# EAGLE board CT_schematic (EAGLE 7.6.0)

Size 100 x 80 mm. Coordinates in mm from the lower left corner, seen from the top.
Outline: 0,0 100,0 100,80 0,80 0,0
Copper layers (1*16): Top 0.035mm / dielectric 1.5mm / Bottom 0.035mm
Design rules "default": minimum track width 10mil, minimum drill 24mil, track to track 8mil, track to pad 8mil, pad to pad 8mil, via to via 8mil, smd to smd 8mil, copper to edge 40mil, drill to drill 8mil, minimum pad ring 10mil, minimum via ring 8mil, stop-mask expansion 4mil, vias tented up to drill 0mil, thermal gap 10mil

## Footprints (pad centres in the part's own frame; a part is rotated, then mirrored left to right if it is on the bottom)
C0603 = smd 0.8 x 0.8: 1 -0.762,0; 2 0.762,0
C0402 = smd 0.5 x 0.5: 1 -0.508,0; 2 0.508,0
C0805 = smd 1.2 x 1.3: 1 -1.016,0; 2 1.016,0
EXV-9B = smd 2.718 x 1.778: 1 -2.108,0; 2 2.108,0
EXV-9H = smd 3.505 x 1.676: 1 -2.857,0; 2 2.857,0
PJ-037B_PACKAGE = drill 3.7 square: 1 12,0 | drill 3.2 square: 2 6,0
R0603 = smd 0.8 x 0.8: 1 -0.762,0; 2 0.762,0
LQFP100 = smd 0.3 x 1.2: 1 -6,-7.75; 2 -5.5,-7.75; 3 -5,-7.75; 4 -4.5,-7.75; 5 -4,-7.75; 6 -3.5,-7.75; 7 -3,-7.75; 8 -2.5,-7.75; 9 -2,-7.75; 10 -1.5,-7.75; 11 -1,-7.75; 12 -0.5,-7.75; 13 0,-7.75; 14 0.5,-7.75; 15 1,-7.75; 16 1.5,-7.75; 17 2,-7.75; 18 2.5,-7.75; 19 3,-7.75; 20 3.5,-7.75; 21 4,-7.75; 22 4.5,-7.75; 23 5,-7.75; 24 5.5,-7.75; 25 6,-7.75; 51 6,7.75; 52 5.5,7.75; 53 5,7.75; 54 4.5,7.75; 55 4,7.75; 56 3.5,7.75; 57 3,7.75; 58 2.5,7.75; 59 2,7.75; 60 1.5,7.75; 61 1,7.75; 62 0.5,7.75; 63 0,7.75; 64 -0.5,7.75; 65 -1,7.75; 66 -1.5,7.75; 67 -2,7.75; 68 -2.5,7.75; 69 -3,7.75; 70 -3.5,7.75; 71 -4,7.75; 72 -4.5,7.75; 73 -5,7.75; 74 -5.5,7.75; 75 -6,7.75 | smd 1.2 x 0.3: 26 7.75,-6; 27 7.75,-5.5; 28 7.75,-5; 29 7.75,-4.5; 30 7.75,-4; 31 7.75,-3.5; 32 7.75,-3; 33 7.75,-2.5; 34 7.75,-2; 35 7.75,-1.5; 36 7.75,-1; 37 7.75,-0.5; 38 7.75,0; 39 7.75,0.5; 40 7.75,1; 41 7.75,1.5; 42 7.75,2; 43 7.75,2.5; 44 7.75,3; 45 7.75,3.5; 46 7.75,4; 47 7.75,4.5; 48 7.75,5; 49 7.75,5.5; 50 7.75,6; 76 -7.75,6; 77 -7.75,5.5; 78 -7.75,5; 79 -7.75,4.5; 80 -7.75,4; 81 -7.75,3.5; 82 -7.75,3; 83 -7.75,2.5; 84 -7.75,2; 85 -7.75,1.5; 86 -7.75,1; 87 -7.75,0.5; 88 -7.75,0; 89 -7.75,-0.5; 90 -7.75,-1; 91 -7.75,-1.5; 92 -7.75,-2; 93 -7.75,-2.5; 94 -7.75,-3; 95 -7.75,-3.5; 96 -7.75,-4; 97 -7.75,-4.5; 98 -7.75,-5; 99 -7.75,-5.5; 100 -7.75,-6
SOIC-8 = smd 1.6 x 0.6: 1 -2.7,1.905 | smd 1.55 x 0.6: 2 -2.7,0.635; 3 -2.7,-0.635; 4 -2.7,-1.905; 5 2.7,-1.905; 6 2.7,-0.635; 7 2.7,0.635; 8 2.7,1.905
QFN-16 = smd 0.813 x 0.305: 1 -1.448,0.75; 2 -1.448,0.25; 3 -1.448,-0.25; 4 -1.448,-0.75; 9 1.448,-0.75; 10 1.448,-0.25; 11 1.448,0.25; 12 1.448,0.75 | smd 0.305 x 0.813: 5 -0.75,-1.448; 6 -0.25,-1.448; 7 0.25,-1.448; 8 0.75,-1.448; 13 0.75,1.448; 14 0.25,1.448; 15 -0.25,1.448; 16 -0.75,1.448 | smd 1.803 x 1.803: 17 0,0
FCI_10118193-0001LF = smd 0.4 x 1.35: 1 -1.3,2.675; 2 -0.65,2.675; 3 0,2.675; 4 0.65,2.675; 5 1.3,2.675 | smd 1.6 x 1.4: 6 -3.2,2.45; 7 3.2,2.45 | smd 1.9 x 1.9: 8 -1.2,0; 9 1.2,0 | hole 0.5: -3.3,0; 3.3,0
SOT143B = smd 1 x 0.7: 1 -0.75,-1 | smd 0.6 x 0.7: 2 0.95,-1; 3 0.95,1; 4 -0.95,1
ABS07-32.768KHZ-7-T = smd 1.1 x 2.4: 1 -2.5,0; 2 0,0
ASFL1 = smd 1.7 x 1.5: 1 -1.27,-1.1; 2 1.27,-1.1; 3 1.27,1.1; 4 -1.27,1.1
LP2954 = smd 1.6 x 0.6: 1 -2.475,1.905 | smd 1.55 x 0.6: 2 -2.475,0.635; 3 -2.475,-0.635; 4 -2.475,-1.905; 5 2.475,-1.905; 6 2.475,-0.635; 7 2.475,0.635; 8 2.475,1.905
SON-6 = smd 0.55 x 0.3: 1 -0.355,0.5 | smd 0.52 x 0.3: 2 -0.37,0; 3 -0.37,-0.5; 4 0.37,-0.5; 5 0.37,0; 6 0.37,0.5
SW_4-1437565-2 = smd 1.4 x 2.1: 1 -2.23,4.55; 2 -2.23,-4.55; 3 2.23,4.55; 4 2.23,-4.55
LGM67K-G1J2-24-Z = smd 0.8 x 1.4: A -2,0; C 0,0
NC7SZ125M5X = smd 1.3 x 0.7: 1 -1.3,0.95; 2 -1.3,0; 3 -1.3,-0.95; 4 1.3,-0.95; 5 1.3,0.95

## Placement (x,y rotation side)
C1  1e-06  [C0603]  -15.24,62.23 0 top  (outside the outline)
C2  1e-07  [C0603]  -19.05,62.23 0 top  (outside the outline)
C3  1e-07  [C0603]  -22.86,62.23 0 top  (outside the outline)
C4  1e-07  [C0603]  -26.67,62.23 0 top  (outside the outline)
C5  1e-07  [C0603]  -30.48,62.23 0 top  (outside the outline)
C6  1e-07  [C0603]  -34.29,62.23 0 top  (outside the outline)
C7  1e-07  [C0603]  -38.1,62.23 0 top  (outside the outline)
C8  4.7e-06  [C0603]  -64.77,57.15 0 top  (outside the outline)
C9  1e-07  [C0603]  -41.91,62.23 0 top  (outside the outline)
C10  1e-08  [C0603]  -45.72,62.23 0 top  (outside the outline)
C11  1e-06  [C0603]  -49.53,62.23 0 top  (outside the outline)
C12  1e-11  [C0402]  -26.67,67.31 0 top  (outside the outline)
C13  1e-11  [C0402]  -30.48,67.31 0 top  (outside the outline)
C14  1e-08  [C0402]  -34.29,67.31 0 top  (outside the outline)
C15  1e-08  [C0402]  -38.1,67.31 0 top  (outside the outline)
C16  4.7e-06  [C0805]  -30.48,50.8 0 top  (outside the outline)
C17  1e-07  [C0402]  -41.91,67.31 0 top  (outside the outline)
C18  1e-07  [C0402]  -45.72,67.31 0 top  (outside the outline)
C19  1e-08  [C0402]  -49.53,67.31 0 top  (outside the outline)
C20  1e-06  [EXV-9B]  -60.96,43.18 0 top  (outside the outline)
C21  2.2e-06  [EXV-9B]  -16.51,50.8 0 top  (outside the outline)
C22  1e-07  [C0402]  -53.34,67.31 0 top  (outside the outline)
C23  0.0001  [EXV-9H]  -59.69,34.29 0 top  (outside the outline)
C24  0.0001  [EXV-9H]  -17.78,44.45 0 top  (outside the outline)
C25  1e-08  [C0402]  -57.15,67.31 0 top  (outside the outline)
J1  PJ-037B  [PJ-037B_PACKAGE]  -48.26,7.62 0 top  (outside the outline)
R2  1000.0  [R0603]  -53.34,62.23 0 top  (outside the outline)
R4  4700.0  [R0603]  -57.15,62.23 0 top  (outside the outline)
R5  2200.0  [R0603]  -60.96,62.23 0 top  (outside the outline)
R6  2200.0  [R0603]  -64.77,62.23 0 top  (outside the outline)
R7  10000.0  [R0603]  -15.24,57.15 0 top  (outside the outline)
R8  10000.0  [R0603]  -20.32,57.15 0 top  (outside the outline)
R9  10000.0  [R0603]  -25.4,57.15 0 top  (outside the outline)
R10  10000.0  [R0603]  -30.48,57.15 0 top  (outside the outline)
R11  10000.0  [R0603]  -35.56,57.15 0 top  (outside the outline)
R12  10000.0  [R0603]  -40.64,57.15 0 top  (outside the outline)
R13  10000.0  [R0603]  -45.72,57.15 0 top  (outside the outline)
R14  10000.0  [R0603]  -50.8,57.15 0 top  (outside the outline)
R15  100000.0  [R0603]  -40.64,50.8 0 top  (outside the outline)
R16  100000.0  [R0603]  -45.72,50.8 0 top  (outside the outline)
R17  164658.62  [R0603]  -35.56,50.8 0 top  (outside the outline)
R18  100000.0  [R0603]  -50.8,50.8 0 top  (outside the outline)
R19  10000.0  [R0603]  -55.88,57.15 0 top  (outside the outline)
R20  10000.0  [R0603]  -60.96,57.15 0 top  (outside the outline)
R21  9100.0  [R0603]  -15.24,67.31 0 top  (outside the outline)
R22  680000.0  [R0603]  -55.88,50.8 0 top  (outside the outline)
R23  120000.0  [R0603]  -60.96,50.8 0 top  (outside the outline)
U1  STM32L486VGT6  [LQFP100]  -24.13,8.89 0 top  (outside the outline)
U2  AT25010B-SSHL-T  [SOIC-8]  -60.96,22.86 0 top  (outside the outline)
U3  AT25512N-SH-T  [SOIC-8]  -22.86,35.56 0 top  (outside the outline)
U4  MMA8451QT  [QFN-16]  -20.32,67.31 0 top  (outside the outline)
U5  10118193-0001LF  [FCI_10118193-0001LF]  -49.53,34.29 0 top  (outside the outline)
U6  prtr5v0u2ax  [SOT143B]  -24.13,72.39 0 top  (outside the outline)
U7  ABS07-32.768KHZ-7-T  [ABS07-32.768KHZ-7-T]  -39.37,44.45 0 top  (outside the outline)
U8  ASFL1-25MHZ-NCS  [ASFL1]  -40.64,34.29 0 top  (outside the outline)
U9  LP2954AIMX/NOPB  [LP2954]  -44.45,22.86 0 top  (outside the outline)
U10  TPS3895ADRYR  [SON-6]  -27.94,71.12 0 top  (outside the outline)
U11  4-1437565-2  [SW_4-1437565-2]  -27.94,24.13 0 top  (outside the outline)
U12  Q65110A2395  [LGM67K-G1J2-24-Z]  -48.26,43.18 0 top  (outside the outline)
U13  nc7sz125m5x  [NC7SZ125M5X]  -24.13,50.8 0 top  (outside the outline)

## Library data of the parts
C1-C25 J1 R2 R4-R23 U1-U13 = circuit_tree

## Nets
CLK_CRYSTAL_U1_8: C12.1 U1.8 U7.1
CLK_CRYSTAL_U1_9: C13.1 U1.9 U7.2
CLK_U1_12: U1.12 U8.3
GND: C1.2 C2.2 C3.2 C4.2 C5.2 C6.2 C7.2 C8.2 C9.2 C10.2 C11.2 C12.2 C13.2 C14.2 C15.2 C16.2 C17.2 C18.2 C19.2 C20.2 C21.2 C22.2 C23.2 C24.2 C25.2 J1.2 R2.2 R7.2 R18.2 R21.2 R23.2 U1.10 U1.19 U1.20 U1.27 U1.49 U1.74 U1.99 U2.4 U3.4 U4.5 U4.10 U4.12 U4.17 U5.5 U5.6 U5.7 U5.8 U5.9 U6.1 U8.2 U9.4 U10.2 U12.C U13.1 U13.3
NET_U1_14: R4.1 U1.14 U13.4
NET_U1_92: R5.1 U1.92 U4.4
NET_U1_93: R6.1 U1.93 U4.6
NET_U1_94: R7.1 U1.94
NET_U1_97: U12.A
NET_U1_98: U11.3 U11.4
NET_U2_3: R8.1 U2.3
NET_U2_7: R10.1 U2.7
NET_U3_3: R11.1 U3.3
NET_U3_7: R13.1 U3.7
NET_U4_2: C18.1 U4.2
NET_U4_7: R14.1 U4.7
NET_U9_3: R16.1 U9.3
NET_U9_5: R15.1 U9.5
NET_U9_7: R17.2 R18.1 U9.7
NET_U10_1: R20.1 R21.1 U10.1
NET_U10_3: R22.2 R23.1 U10.3
NET_U10_4: R19.1 U10.4 U13.2
NET_U11_1: R2.1 U11.1 U11.2
PROC_SPI1_MISO: U1.31 U3.2
PROC_SPI1_MOSI: U1.32 U3.5
PROC_SPI1_NSS: R12.1 U1.29 U3.1
PROC_SPI1_SCK: U1.30 U3.6
PROC_SPI2_MISO: U1.17 U2.2
PROC_SPI2_MOSI: U1.18 U2.5
PROC_SPI2_NSS: R9.1 U1.51 U2.1
PROC_SPI2_SCK: U1.47 U2.6
PROC_USB_OTG_FS_DM: U1.70 U5.2 U6.3
PROC_USB_OTG_FS_DP: U1.71 U5.3 U6.2
PROC_USB_OTG_FS_VBUS: U1.68 U5.1 U6.4
VCC_S1_4V9: C20.1 C23.1 C24.1 J1.1 R16.2 U9.8
VCC_TIER1_3V3: C1.1 C2.1 C3.1 C4.1 C5.1 C6.1 C7.1 C8.1 C9.1 C10.1 C11.1 C14.1 C15.1 C16.1 C17.1 C19.1 C21.1 C22.1 C25.1 R4.2 R5.2 R6.2 R8.2 R9.2 R10.2 R11.2 R12.2 R13.2 R14.2 R15.2 R17.1 R19.2 R20.2 R22.1 U1.6 U1.11 U1.21 U1.22 U1.28 U1.50 U1.73 U1.75 U1.100 U2.8 U3.8 U4.1 U4.14 U8.4 U9.1 U10.6 U13.5

## Tracks (layer width: path | path; a pad name or v marks a point on that pad's centre or on a via)
CLK_CRYSTAL_U1_8  (2 unrouted)
CLK_CRYSTAL_U1_9  (2 unrouted)
CLK_U1_12  (1 unrouted)
GND  (55 unrouted)
NET_U1_14  (2 unrouted)
NET_U1_92  (2 unrouted)
NET_U1_93  (2 unrouted)
NET_U1_94  (1 unrouted)
NET_U1_98  (1 unrouted)
NET_U2_3  (1 unrouted)
NET_U2_7  (1 unrouted)
NET_U3_3  (1 unrouted)
NET_U3_7  (1 unrouted)
NET_U4_2  (1 unrouted)
NET_U4_7  (1 unrouted)
NET_U9_3  (1 unrouted)
NET_U9_5  (1 unrouted)
NET_U9_7  (2 unrouted)
NET_U10_1  (2 unrouted)
NET_U10_3  (2 unrouted)
NET_U10_4  (2 unrouted)
NET_U11_1  (2 unrouted)
PROC_SPI1_MISO  (1 unrouted)
PROC_SPI1_MOSI  (1 unrouted)
PROC_SPI1_NSS  (2 unrouted)
PROC_SPI1_SCK  (1 unrouted)
PROC_SPI2_MISO  (1 unrouted)
PROC_SPI2_MOSI  (1 unrouted)
PROC_SPI2_NSS  (2 unrouted)
PROC_SPI2_SCK  (1 unrouted)
PROC_USB_OTG_FS_DM  (2 unrouted)
PROC_USB_OTG_FS_DP  (2 unrouted)
PROC_USB_OTG_FS_VBUS  (2 unrouted)
VCC_S1_4V9  (5 unrouted)
VCC_TIER1_3V3  (50 unrouted)